# Altium PCB DT JFET Pre.PcbDoc
Units mil, origin at the board's own origin, x right, y up, seen from the top; angles counter-clockwise.
Board outline 910 x 465 mil, 2 copper layers (Top Layer, Bottom Layer); 12 components, 7 nets, 25 pads, 3 vias.
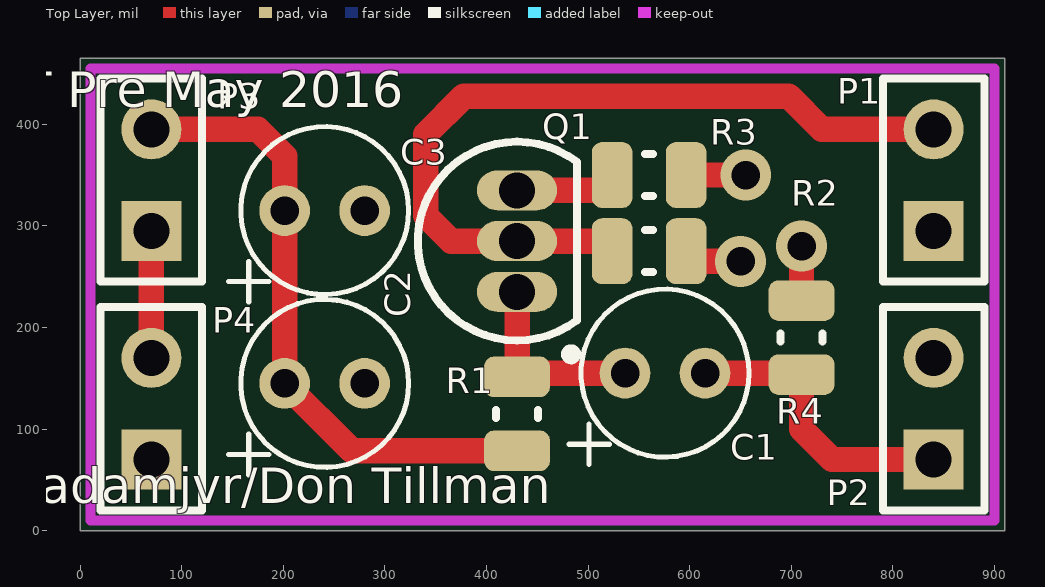
[diagram p0: Top Layer view]
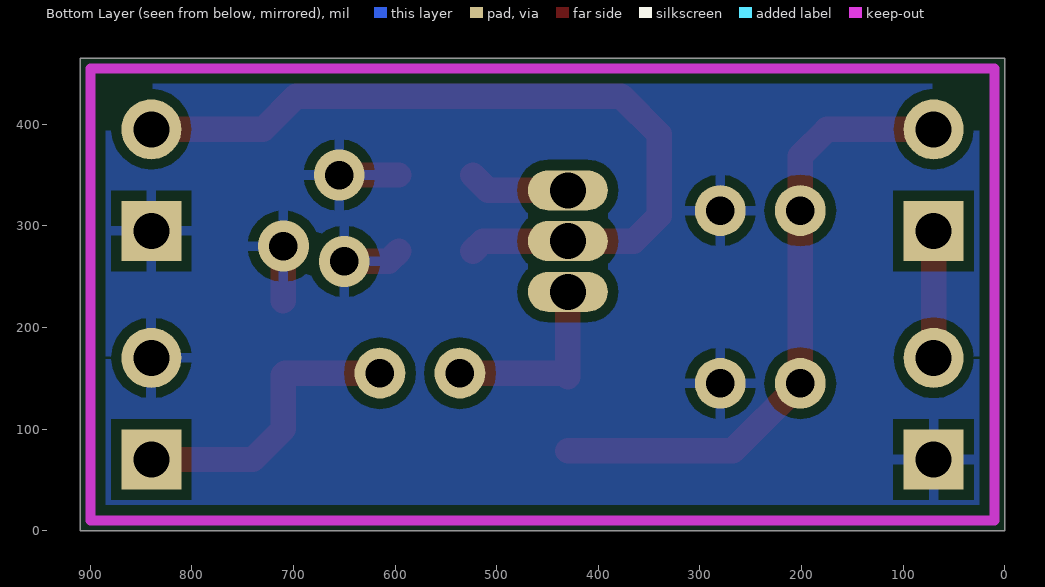
[diagram p1: Bottom Layer view, seen from below]

## Layer stack, top to bottom
Top Solder: solder mask 0.4, Solder Resist, Dk 3.5
Top Layer: signal copper 1.4
Dielectric 1: dielectric 12.6, FR-4, Dk 4.8
Bottom Layer: signal copper 1.4
Bottom Solder: solder mask 0.4, Solder Resist, Dk 3.5

## Board outline
0,0 0,465 910,465 910,0

## Design rules (kind name [scope] priority, off if disabled: settings)
Clearance [All] p1: gap=10
PolygonConnect [All] p1: connectstyle=Relief reliefconductorwidth=10 reliefentries=4 polygonreliefangle="90 Angle" airgapwidth=10
RoutingVias [All] p1: holewidth=28 width=50 viastyle="Through Hole" minholewidth=28 minwidth=50 maxholewidth=28 maxwidth=50
SolderMaskExpansion [All] p1: expansion=4
Width [All] p1: maxlimit=50 minlimit=10 preferedwidth=10 minimp=50.000000 maximp=50.000000 favimp=50.000000
30 further rules are at their usual default settings.

## Components (designator, comment, footprint, x,y, rotation, side; value= is the part's Value field where it differs from the comment)
C1 "4.7uF" 4X6mmCAP 615,155 r180 top
C2 "10uF" 4X6mmCAP 280,145 r180 top
C3 "10uF" 4X6mmCAP 280,315 r180 top
P1 "Header 2" HDR1X2 840,295 r90 top
P2 "Header 2" HDR1X2 840,70 r90 top
P3 "Header 2" HDR1X2 70,295 r90 top
P4 "Header 2" HDR1X2 70,70 r90 top
Q1 "2N5457" TO-92A 430,285 r0 top
R1 "6.8K" R0805 430,115 r270 top
R2 "3M" R0805 560,275 r180 top
R3 "2.2K" R0805 560,350 r180 top
R4 "51K" R0805 710,190 r270 top

## Footprints (in the part's own frame and the unit in brackets; to place one, negate y for a bottom-side part, rotate by r counter-clockwise, add the part's x,y. Pads: shape width x height; smd on the part's side, far side on the other; paste and mask are expansions set on the pad)
4X6mmCAP [mil]
  round 50 hole 28: 1(78.74,0) 2(0,0)
  silkscreen extent -43,-83 134,90, body extent -39,-79 119,79, height 236
HDR1X2 [mm] "Connector; Header; 2 Position"
  rect 1.5x1.5 hole 0.9: 1(0,0)
  round 1.5 hole 0.9: 2(2.54,0)
  silkscreen extent -1.27,-1.27 3.81,1.27
R0805 [mil]
  rrect50% 40x65 smd: 1(-36.42,0) 2(36.42,0)
  silkscreen extent -4,-21 4,21, body extent -43,-28 43,28, height 20
TO-92A [mm] "TO, Flat Index; 3 In-Line, Axial Leads; Body Dia. 4.5mm; Leads 0.51 x 0.48 mm (max)"
  oval 2x1 hole 0.9: 1(0,-1.27) 2(0,0) 3(0,1.27)
  silkscreen extent -2.48,-2.95 1.5,2.48, body extent -2.48,-2.5 1.5,2.5, height 6.86

## Part data
C1: library part UMW1V4R7MDD1TP, "CAP ALUM 4.7UF 20% 35V RADIAL"
C2 C3: library part UMW1C100MDD1TP, "CAP ALUM 10UF 20% 16V RADIAL"
P1 P2 P3 P4: "Header, 2-Pin"
Q1: "JFET N-CH 25V 0.31W TO-92"
R1: library part RC2012F682CS, "RES SMD 6.8K OHM 1% 1/8W 0805"
R2: library part RC2012F305CS, "RES SMD 3M OHM 1% 1/8W 0805"
R3: library part RC2012F222CS, "RES SMD 2.2K OHM 1% 1/8W 0805"
R4: library part RC2012F513CS, "RES SMD 51K OHM 1% 1/8W 0805"

## Via types
v1: diameter 50, hole 28, Top Layer to Bottom Layer, 3 vias

## Nets (pads, with @x,y where several pads share a name; then routed paths per layer and width w, separated by ;. In a path a pad name is that pad's centre, name@x,y a point inside that pad or via, vN(x,y) a via of type N, cw(c..) or ccw(c..) an arc to the next point about the centre after c; other vN are vias at no path point)
9VCC: C2.1 C3.1 P3.2 R1.2 | length 622.1
  Top Layer w25: P3.2 175,395 201.26,368.74 C3.1 C2.1 267.68,78.58 R1.2
GND: C2.2 C3.2 P1.1 P2.2 P4.1 R2.1 R3.1 R4.1 | length 169.9
  Top Layer w25: R2.1 606.42,265 v1(650,265) ; R3.1 v1(655,350) ; R4.1 v1(710,280)
NetC1_1: C1.1 Q1.1 R1.1 | length 205.5
  Top Layer w25: Q1.1 R1.1 433.58,155 C1.1 ; C1.1@531.26,145 C1.1@541.26,155
NetC1_2: C1.2 P2.1 R4.2 | length 291.6
  Top Layer w25: C1.2 708.58,155 R4.2 710,100 740,70 P2.1
NetP1_2: P1.2 Q1.2 R2.2 | length 807.1
  Top Layer w25: R2.2 513.58,285 Q1.2 365,285 340,310 340,390 377.5,427.5 697.5,427.5 730,395 P1.2
NetP3_1: P3.1 P4.2 | length 125
  Top Layer w25: P4.2 P3.1
NetQ1_3: Q1.3 R3.2 | length 99.8
  Top Layer w25: Q1.3 508.58,335 R3.2

## Polygon pours and split planes (outlines as drawn)
GND on Bottom Layer "Ground-Plane" (solid, remove dead copper, pour order 0): 0,465 910,465 910,0 0,0

## Keep-outs
Keep-Out Layer:
  lines w10: 10,10 900,10 900,455 10,455 10,10

## Silkscreen, mask and mechanical layers (free items; w line width, h text height)
Top Overlay:
  text "DT Pre May 2016" at -95,405 h60
  text "adamjvr/Don Tillman" at -40,15 h60
Mechanical 15:
  the board outline again, w10